# Allegro board proiect_osc_triunghiular.brd
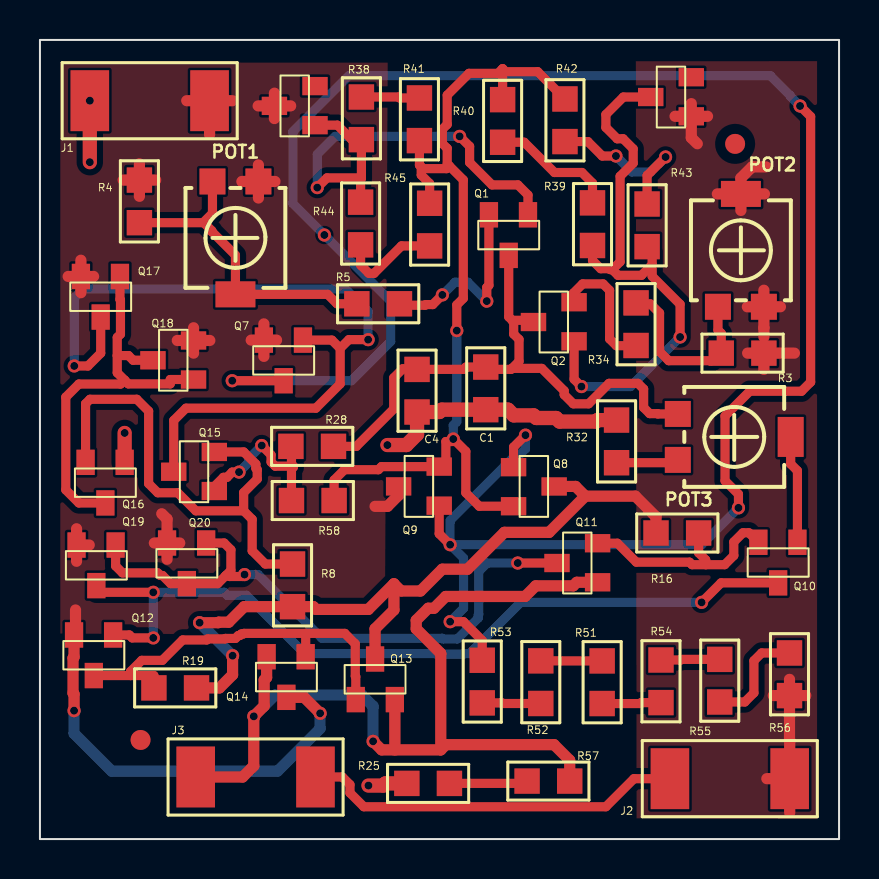
[diagram p0: board, top side]
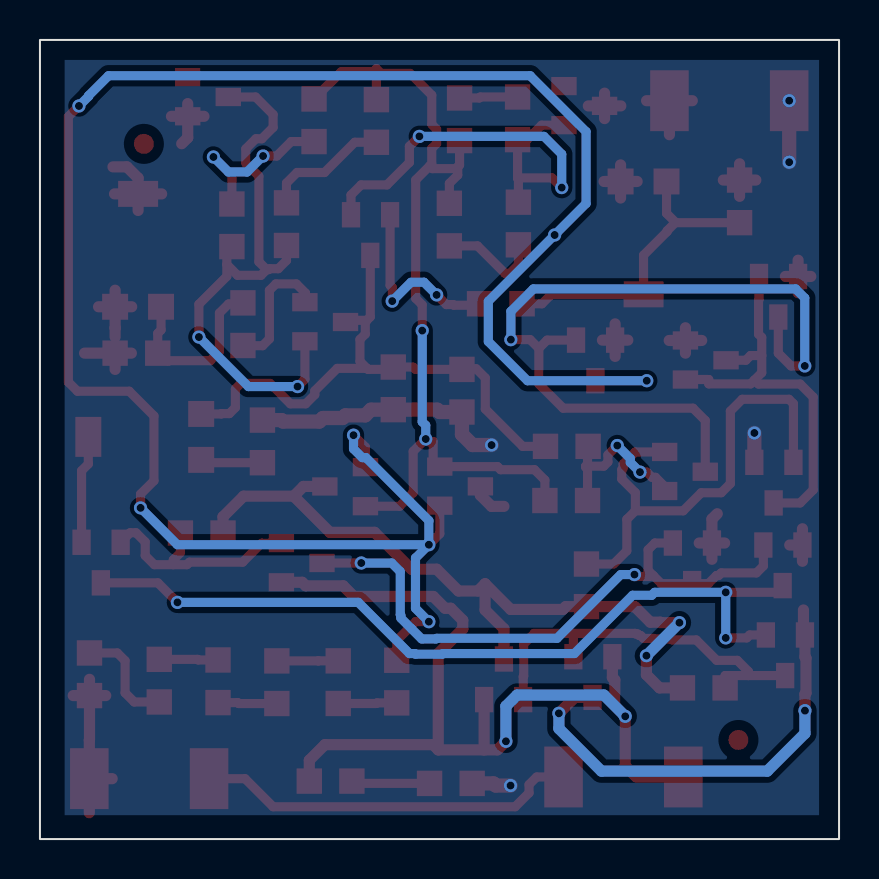
[diagram p1: board, bottom side, seen from below]

Outline 40 x 40 mm; copper layers: TOP, BOTTOM. Coordinates in mm from the lower left corner of the outline.
Outline path: rectangle 0,0 40,40

## Design rules (mm)
nets with their own width: min track width 0.457; nets N105014 N105128 N105158 N105164 N105168 N105322 N105464 N105684 N105962 N108528 N108991 N108998 N109664 N112512 N126084 N126262 N126327 N136654 N136658 N136718 N136852 N142019 N142027 N144715 N144719 N151868 N162734 N163771 N1445831 N1446051
nets with their own width: min track width 0.559; nets OUT VDD VEE
nets with their own width: min track width 0.711; nets GND

## Placement (name value [footprint] x y rotation side)
C1  100p  [SMC0805]  22.31 21.49 90 top
C4  470p  [SMC0805]  18.88 21.38 90 top
D1  BZX84-C2V7  [TO236]  32.48 36.18 0 top
D2  BZX84-C2V7  [TO236]  13.64 35.73 0 top
J1  CON2  [SMR2512]  2.5 36.96 0 top
J2  CON2  [SMR2512]  31.53 3.02 0 top
J3  CON2  [SMR2512]  7.8 3.11 0 top
NOREF  -  [unnamed]  5.04 4.96 0 top
NOREF#2  -  [unnamed]  34.8 34.8 0 top
POT1  50k  [TS53YL]  8.64 32.92 90 top
POT2  50k  [TS53YL]  36.24 26.64 270 top
POT3  500k  [TS53YL]  31.93 18.98 180 top
Q1  QBC856B  [TO236]  24.43 31.12 90 top
Q2  QBC846B  [TO236]  26.61 24.92 0 top
Q7  QBC856B  [TO236]  13.16 24.85 90 top
Q8  QBC856B  [TO236]  23.83 18.62 180 top
Q9  QBC846B  [TO236]  19.86 16.69 0 top
Q10  QBC846B  [TO236]  37.92 14.73 90 top
Q11  QBC846B  [TO236]  27.79 12.85 0 top
Q12  QBC856B  [TO236]  3.66 10.09 90 top
Q13  QBC856B  [TO236]  15.81 7.11 270 top
Q14  QBC846B  [TO236]  13.3 9 90 top
Q15  QBC846B  [TO236]  8.6 17.42 0 top
Q16  QBC846B  [TO236]  4.24 18.73 90 top
Q17  QBC856B  [TO236]  4.01 28.03 90 top
Q18  QBC856B  [TO236]  7.56 23 0 top
Q19  QBC856B  [TO236]  3.79 14.59 90 top
Q20  QBC856B  [TO236]  8.32 14.69 90 top
R3  15k  [SMR0805]  36.24 24.32 180 top
R4  15k  [SMR0805]  4.98 30.85 90 top
R5  1.5k  [SMR0805]  18 26.79 180 top
R8  47k  [SMR0805]  12.64 11.63 90 top
R16  22k  [SMR0805]  30.84 15.32 0 top
R19  10K  [SMR0805]  7.84 7.57 180 top
R25  10K  [SMR0805]  18.36 2.79 0 top
R28  150k  [SMR0805]  14.69 19.66 180 top
R32  47k  [SMR0805]  28.86 20.97 270 top
R34  1.5k  [SMR0805]  29.84 26.84 270 top
R38  2.2k  [SMR0805]  16.09 37.14 270 top
R39  2.2k  [SMR0805]  27.66 29.71 90 top
R40  2.2k  [SMR0805]  23.16 34.88 90 top
R41  2.2k  [SMR0805]  19 34.96 90 top
R42  2.2k  [SMR0805]  26.28 34.91 90 top
R43  2.2k  [SMR0805]  30.39 29.66 90 top
R44  2.2k  [SMR0805]  16.05 29.75 90 top
R45  2.2k  [SMR0805]  19.51 31.83 270 top
R51  510  [SMR0805]  28.14 8.92 270 top
R52  510  [SMR0805]  25.07 6.79 90 top
R53  510  [SMR0805]  22.14 8.95 270 top
R54  510  [SMR0805]  31.09 8.96 270 top
R55  510  [SMR0805]  34.03 6.86 90 top
R56  510  [SMR0805]  37.52 7.18 90 top
R57  10K  [SMR0805]  24.38 2.9 0 top
R58  220k  [SMR0805]  12.59 16.94 0 top

## Library data of the parts
C1 C4 = C
D1 D2 = BZX84-C2V7_1
J1-J3 = CON2
POT1-POT3 = POT
Q1 Q7 Q8 Q12 Q13 Q17-Q20 = QBC856B_0
Q2 Q9-Q11 Q14-Q16 = QBC846B_0
R3-R5 R8 R16 R19 R25 R28 R32 R34 R38-R45 R51-R58 = R

## Footprints (pads in the part's own frame, mm; a bottom-side part is the same pattern mirrored in y, then rotated)
SMC0805
  rect 1.27x1.27 smd: 1(0,0) 2(2.134,0)
SMR0805
  rect 1.27x1.27 smd: 1(0,0) 2(2.134,0)
SMR2512
  rect 1.93x3.048 smd: 1(0,0) 2(5.994,0)
TO236
  rect 1.27x0.914 smd: 1(0.127,0) 2(0.127,1.956) 3(-1.905,0.965)
TS53YL
  rect 1.3x1.3 smd: 1(0,0) 3(0,-2.3)
  rect 1.3x2 smd: 2(-5.65,-1.15)
unnamed
  round 1 smd: (0,0)

## Nets
GND: C1.1 C4.1 J1.1 Q16.1 R25.1 R32.1
VDD: D2.3 J1.2 POT1.3 Q7.2(E) Q9.3 Q12.2(E) Q14.3 Q17.2(E) Q18.2(E) Q19.2(E) Q20.2(E) R4.2
VEE: D1.1 J2.2 POT2.1 POT2.2(T) Q8.3 Q13.3 R3.1 R8.1 R16.1 R19.1 R56.1
OUT: J3.1 Q11.1 Q13.2(E) Q14.2(E) R57.2
N105014: D2.1 Q1.1 R38.2 R44.2
N105128: Q10.3 Q12.1 Q19.3
N105158: C1.2 C4.2 POT3.3 Q1.3 Q2.3 R28.1
N105164: Q7.3 Q8.1 Q9.1 R53.1
N105168: Q12.3 Q13.1 Q14.1 R19.2
N105322: Q8.2(E) Q9.2(E) R40.2 R41.1 R42.2 R45.1 R58.2
N105464: Q10.2(E) Q11.2(E) R16.2
N105684: D1.3 Q2.1 R39.1 R43.1
N105962: POT2.3 R3.2 R34.1
N108528: Q15.2(E) Q16.2(E) R8.2
N108991: Q16.3 Q17.1 Q18.1 Q18.3
N108998: Q7.1 Q15.3 Q17.3
N109664: Q11.3 Q19.1 Q20.1 Q20.3
N112512: POT1.1 POT1.2(T) R4.1 R5.2
N126084: Q15.1 R28.2 R58.1
N126262: POT3.2(T) Q10.1
N126327: POT3.1 R32.2
N136654: R38.1 R41.2
N136658: R39.2 R40.1
N136718: R42.1 R43.2
N136852: R44.1 R45.2
N142019: Q2.2(E) R34.2
N142027: Q1.2(E) R5.1
N144715: R54.1 R55.2
N144719: R55.1 R56.2
N151868: R51.2 R54.2
N162734: J2.1 J3.2
N163771: R25.2 R57.1
N1445831: R51.1 R52.2
N1446051: R52.1 R53.2

Pads without a net: D1 2; D2 2

## Via types
v1: diameter 0.66, hole 0.4, TOP to BOTTOM, 37 vias

## Routing (per net, layer and track width the routed paths; a pad name or vN(x,y) marks a point on that pad's centre or on a via; arc(x,y) is an arc through that point)
GND: length 19.6
  TOP w0.711: R32.1 27.91,20.97 27.83,20.9 26.02,20.9 25.84,21.08 24.85,21.08 24.71,21.21 23.72,21.21 23.43,21.49 C1.1 20.11,21.49 19.99,21.38 C4.1 18.88,20.26 18.34,19.72 v1(17.39,19.72) ; v1(16.44,2.68) 17.19,2.68 17.29,2.79 R25.1 ; Q16.1 v1(4.24,20.33) ; v1(2.5,36.96) v1(2.5,33.88)
VDD: length 53.6
  TOP w0.559: Q17.2 2.05,28.97 ; Q17.2 1.41,28.16 ; Q17.2 2.05,27.35 ; Q17.2 2.69,28.16 ; Q7.2 11.21,25.79 ; Q7.2 11.84,24.97 ; Q7.2 11.21,24.16 ; Q7.2 10.57,24.97 ; Q14.3 13.22,7.09 v1(14.02,6.29) ; 10.94,32.09 POT1.3 ; POT1.3 10.94,33.74 ; POT1.3 10.11,32.92 ; POT1.3 11.76,32.92 ; J1.2 8.49,37.43 ; J1.2 9.63,36.96 ; J1.2 8.49,35.26 ; J1.2 7.35,36.96 ; 6.88,24.96 Q18.2 ; Q18.2 7.69,24.32 ; Q18.2 8.5,24.96 ; Q18.2 7.69,25.59 ; R4.2 4.98,33.8 ; R4.2 4.17,32.99 ; R4.2 4.98,32.17 ; R4.2 5.79,32.99 ; 6.1,16.28 6.36,16.02 Q20.2 ; 6.36,14.01 Q20.2 ; Q20.2 7,14.82 ; Q20.2 5.73,14.82 ; 1.83,13.9 Q19.2 ; Q19.2 2.47,14.72 ; Q19.2 1.83,15.53 ; 1.78,11.47 1.78,10.22 Q12.2 1.71,9.11 1.66,9.06 1.66,7.31 1.71,7.25 v1(1.71,6.43) ; D2.3 12.55,36.7 ; D2.3 10.92,36.7 ; D2.3 11.74,37.34 ; D2.3 11.74,36.06 ; 17.78,17.65 Q9.3 17.95,17.21 17.39,16.65 16.78,16.65
  BOTTOM w0.559: v1(1.71,6.43) 1.71,5.29 3.59,3.4 11.89,3.4 14.02,5.53 v1(14.02,6.29)
VEE: length 64.2
  TOP w0.559: 27.3,17.16 29.81,17.16 30.84,16.13 R16.1 ; 27.3,17.16 25.49,15.35 23.25,15.35 21.4,13.51 20.14,13.51 19.05,12.42 18.08,12.42 17.72,12.78 ; 27.3,17.16 26.81,17.65 Q8.3 ; 17.72,12.78 17.72,11.47 16.77,10.52 Q13.3 ; 17.72,12.78 16.44,11.49 13.82,11.49 13.68,11.63 R8.1 10.23,11.63 9.45,10.86 8.95,10.86 8.92,10.83 v1(7.99,10.83) ; 32.9,34.81 32.6,35.11 D1.1 ; POT2.2 36.27,32.29 ; POT2.2 35.09,31.47 ; POT2.2 35.09,33.09 35.65,33.65 36.34,33.65 ; POT2.2 33.91,32.29 ; R19.1 8.99,7.57 9.64,8.22 v1(9.64,9.18) ; R56.1 37.52,4.96 37.53,4.95 J2.2 ; R56.1 36.71,7.18 ; R56.1 38.33,7.18 ; R56.1 37.52,7.99 ; POT2.1 37.07,26.64 ; POT2.1 36.24,27.47 ; POT2.1 36.24,25.59 36.24,25.14 ; POT2.1 35.41,26.64 ; D1.1 32.6,36.81 ; D1.1 33.42,36.18 ; D1.1 31.79,36.18 ; J2.2 37.53,1.32 ; J2.2 36.39,3.02 ; 36.24,23.51 R3.1 ; R3.1 37.77,24.32 ; R3.1 35.42,24.32
  BOTTOM w0.559: v1(7.99,10.83) v1(9.64,9.18)
OUT: length 48.1
  TOP w0.559: 20.06,4.46 17.81,4.46 17.77,4.51 ; 20.06,4.46 20.06,9.29 18.84,10.52 18.84,10.95 19.44,11.55 19.72,11.55 20.31,12.14 24.28,12.14 24.82,12.67 26.69,12.67 26.87,12.85 Q11.1 ; 20.06,4.46 20.32,4.72 25.74,4.72 26.52,3.94 R57.2 ; J3.1 10.14,3.11 10.7,3.66 v1(10.7,6.14) 11.22,6.66 11.22,7.96 11.35,8.08 Q14.2 ; 17.77,4.51 Q13.2 ; 17.77,4.51 17.72,4.46 17.1,4.46 v1(16.68,4.89)
  BOTTOM w0.559: v1(16.68,4.89) 16.68,6.65 16.12,7.21 11.77,7.21 v1(10.7,6.14)
N105014: length 23.5
  TOP w0.457: 16.09,33.09 R38.2 15.61,35.01 14.89,35.73 D2.1 ; 16.09,33.09 16.05,33.04 R44.2 ; 16.09,33.09 16.08,33.09 14.37,33.09 v1(13.88,32.61) ; Q1.1 24.43,32.24 23.92,32.74 22.63,32.74 21.51,33.87 21.51,34.67 v1(21.01,35.17)
  BOTTOM w0.457: v1(13.88,32.61) 13.88,34.28 14.77,35.17 v1(21.01,35.17)
N105128: length 41.6
  TOP w0.457: Q10.3 34.1,12.82 v1(33.12,11.85) ; Q19.3 2.82,12.35 v1(5.67,12.35) ; v1(5.67,10.07) 4.62,10.07 4.47,10.22 Q12.1
  BOTTOM w0.457: v1(5.67,10.07) v1(5.67,12.35) 9.23,12.35 9.38,12.2 10.33,12.2 13.25,9.28 19.83,9.28 19.86,9.25 21.21,9.25 21.24,9.28 21.5,9.28 24.07,11.85 v1(33.12,11.85)
N105158: length 29.5
  TOP w0.457: 23.64,25.97 23.46,26.14 Q1.3 ; 23.64,25.97 24.62,25.97 Q2.3 ; 23.64,25.97 23.71,25.89 23.71,25.28 23.98,25.01 23.98,23.91 23.63,23.56 ; R28.1 15.84,19.66 17.71,21.53 17.71,23.09 18.16,23.54 18.84,23.54 C4.2 21.21,23.51 21.32,23.63 C1.2 22.31,23.51 23.58,23.51 23.63,23.56 ; 23.63,23.56 25.12,23.56 26.24,22.44 26.24,22.24 26.7,21.79 27.46,21.79 28.49,22.81 29.93,22.81 30.22,22.53 30.22,21.6 30.52,21.3 30.91,21.3 30.92,21.28 POT3.3
N105164: length 108.7
  TOP w0.457: Q8.1 23.71,19.62 v1(24.3,20.22) ; v1(38.05,36.69) 38.58,36.16 38.58,22.87 38.12,22.42 35.53,22.42 34.29,21.18 34.29,17.94 34.96,17.26 v1(34.96,16.58) ; Q7.3 v1(9.63,22.94) ; v1(20.53,14.73) 19.98,15.28 Q9.1 ; R53.1 22.14,9.94 21.2,10.88 v1(20.53,10.88)
  BOTTOM w0.457: v1(24.3,20.22) 24.3,19.53 23.87,19.09 23.68,19.09 20.53,15.94 v1(20.53,14.73) ; v1(20.53,14.73) 21.2,14.06 21.2,11.55 v1(20.53,10.88) ; v1(20.53,14.73) 33.12,14.73 v1(34.96,16.58) ; v1(9.63,22.94) 15.59,22.94 17.56,24.91 17.56,26.92 v1(14.24,30.24) 12.66,31.81 12.66,35.41 15.46,38.21 36.57,38.21 37.56,37.21 37.56,37.18 v1(38.05,36.69)
N105168: length 20.1
  TOP w0.457: 13.3,10.29 10.21,10.29 10.18,10.27 10.08,10.27 10,10.19 9.93,10.19 9.78,10.04 9.28,10.04 9.26,10.02 8.4,10.02 8.35,9.97 7.15,9.97 6.12,8.95 5.09,8.95 4.54,8.39 4.54,8.18 ; 13.3,10.29 15.26,10.29 15.78,9.77 15.78,8.16 15.81,8.13 Q13.1 ; 13.3,10.29 Q14.1 ; 4.54,8.18 5.7,8.18 R19.2 ; 4.54,8.18 Q12.3
N105322: length 45.7
  TOP w0.457: 20.49,33.7 20.39,33.8 20.39,34.57 20.14,34.81 20.14,35.53 20.39,35.77 20.39,37.24 21.48,38.33 22.93,38.33 23.16,38.56 ; 20.49,33.7 21.19,32.99 21.19,27.06 20.87,26.74 v1(20.87,25.45) ; 20.49,33.7 20.35,33.56 19.18,33.56 19.09,33.65 ; 23.16,38.56 23.31,38.41 24.91,38.41 R42.2 ; 23.16,38.56 R40.2 ; Q8.2 21.99,16.66 21.32,17.33 21.32,19.4 20.82,19.9 20.56,19.9 ; 20.56,19.9 20.32,19.9 20.32,18.64 Q9.2 ; 20.56,19.9 v1(20.69,20.02) ; 19.98,18.6 Q9.2 ; Q9.2 17.1,18.64 16.94,18.49 15.24,18.49 14.72,17.97 R58.2 ; 19.09,33.65 19.09,33.24 19.51,32.82 R45.1 ; 19.09,33.65 19,33.74 R41.1
  BOTTOM w0.457: v1(20.69,20.02) 20.69,20.71 20.87,20.89 v1(20.87,25.45)
N105464: length 11.5
  TOP w0.457: R16.2 32.97,14.33 33.33,13.97 33.33,13.73 ; 33.33,13.73 32.64,13.73 32.52,13.86 29.85,13.86 28.9,14.81 Q11.2 ; 33.33,13.73 34.27,13.73 34.73,14.19 34.73,14.87 35.19,15.33 35.49,15.33 Q10.2
N105684: length 29.4
  TOP w0.457: D1.3 29.2,37.14 28.33,36.27 28.33,35.62 28.9,35.05 29.19,35.05 29.7,34.55 29.7,33.83 29.04,33.18 29.04,28.89 28.65,28.5 ; Q2.1 26.74,23.02 v1(27.11,22.65) ; 28.65,28.5 28.55,28.5 28.51,28.55 28.07,28.55 27.66,28.96 R39.1 ; 28.65,28.5 28.93,28.22 30.11,28.22 30.65,28.75 ; v1(32.04,25.13) 32.04,26.77 30.65,28.17 30.65,28.75 ; 30.65,28.75 30.65,29.4 R43.1
  BOTTOM w0.457: v1(32.04,25.13) 29.56,22.65 v1(27.11,22.65)
N105962: length 9.1
  TOP w0.457: POT2.3 33.94,25.48 34.1,25.31 R3.2 34.02,24.32 33.64,23.95 31.47,23.95 31.02,24.4 31.02,26.33 30.56,26.79 29.89,26.79 R34.1
N108528: length 24.8
  TOP w0.457: Q15.2 10.2,19.38 10.81,18.77 10.81,18.56 10.88,18.49 10.88,18.02 10.2,17.34 10.2,16.43 ; 10.2,16.43 10.62,16 10.62,14.43 11.28,13.77 R8.2 ; 10.2,16.43 7.8,16.43 6.9,17.33 5.9,17.33 5.44,17.79 5.44,21.42 4.85,22.01 2.51,22.01 2.28,21.79 Q16.2
N108991: length 21.2
  TOP w0.457: 4.23,22.98 4.43,22.78 6.52,22.78 6.52,23 Q18.1 ; 4.23,22.98 3.87,23.34 3.87,24.2 ; 4.23,22.98 4.03,22.78 1.95,22.78 1.29,22.12 1.29,17.48 1.95,16.82 Q16.3 ; 3.87,24.2 4.43,24.2 4.67,23.97 Q18.3 ; 3.87,24.2 3.87,25.11 4.03,25.27 4.03,26.99 4.01,27.01 Q17.1
N108998: length 40.6
  TOP w0.457: 15.03,24.56 15.46,25 v1(16.43,25) ; 15.03,24.56 15.03,22.78 13.81,21.57 7.31,21.57 6.7,20.95 Q15.3 ; 15.03,24.56 14.61,24.97 Q7.1 ; v1(1.72,23.68) 2.4,23.68 3.04,24.32 Q17.3
  BOTTOM w0.457: v1(16.43,25) 16.43,26.41 15.3,27.54 2.17,27.54 1.72,27.08 v1(1.72,23.68)
N109664: length 30.9
  TOP w0.457: Q19.1 3.79,13.67 4.13,13.32 5.9,13.32 6.03,13.19 6.13,13.19 6.54,12.79 Q20.3 8.9,12.79 9.29,13.18 ; 9.29,13.18 9.56,13.45 9.56,14.48 9.22,14.82 Q20.1 8.32,14.64 ; 9.29,13.18 9.46,13.18 9.5,13.14 10.14,13.14 v1(10.24,13.24) ; Q11.3 v1(23.92,13.82)
  BOTTOM w0.457: v1(10.24,13.24) 10.93,13.24 14.12,10.05 20.14,10.05 20.18,10.02 20.89,10.02 21.4,10.52 21.94,11.06 21.94,11.2 21.96,11.23 21.96,13.39 22.39,13.82 v1(23.92,13.82)
N112512: length 16
  TOP w0.457: R5.2 14.87,26.79 14.4,27.27 POT1.2 9.79,29.22 8.61,30.41 8.61,30.45 8.18,30.87 ; 8.18,30.87 8.64,31.32 POT1.1 ; 8.18,30.87 8.17,30.85 R4.1
N126084: length 8.7
  TOP w0.457: R58.1 12.59,18.52 12.68,18.61 12.68,18.67 ; 12.68,18.67 12.59,18.76 12.59,19.63 R28.2 12.44,19.77 ; 12.68,18.67 11.78,18.67 11.57,18.87 11.57,19.23 v1(11.1,19.7) ; Q15.1 8.73,17.65 9.19,18.11 9.36,18.11 9.62,18.37 v1(9.97,18.37)
  BOTTOM w0.457: v1(11.1,19.7) 10.45,19.05 10.45,18.85 v1(9.97,18.37)
N126262: length 5.4
  TOP w0.457: POT3.2 37.58,18.77 37.92,18.44 Q10.1
N126327: length 3.1
  TOP w0.457: POT3.1 31.79,18.84 R32.2
N136654: length 2.9
  TOP w0.457: R41.2 18,37.1 17.96,37.14 R38.1
N136658: length 6.3
  TOP w0.457: R39.2 27.66,32.84 27.13,33.36 25.76,33.36 24.24,34.88 R40.1
N136718: length 8.7
  TOP w0.457: v1(31.32,34.14) 30.39,33.22 R43.2 ; R42.1 27.42,34.91 28.15,34.19 v1(28.83,34.19)
  BOTTOM w0.457: v1(28.83,34.19) 29.63,33.39 30.57,33.39 v1(31.32,34.14)
N136852: length 5.2
  TOP w0.457: R45.2 18.1,29.69 16.72,28.32 16.47,28.32 16.05,28.73 R44.1
N142019: length 6.5
  TOP w0.457: Q2.2 26.71,26.9 26.71,27.33 27.16,27.79 28.19,27.79 28.51,27.46 28.51,25.04 28.86,24.69 29.83,24.69 R34.2
N142027: length 9.6
  TOP w0.457: Q1.2 22.47,27.72 22.37,27.61 v1(22.37,26.93) ; R5.1 18.07,26.72 19.28,26.72 19.31,26.75 19.66,26.75 v1(20.14,27.24)
  BOTTOM w0.457: v1(22.37,26.93) 21.42,27.87 20.78,27.87 v1(20.14,27.24)
N144715: length 3
  TOP w0.457: R54.1 32.08,8.96 32.11,8.99 R55.2
N144719: length 5.5
  TOP w0.457: R55.1 35.28,6.86 35.74,7.32 35.74,8.93 36.13,9.31 R56.2
N151868: length 3
  TOP w0.457: R51.2 30.05,6.78 30.1,6.83 R54.2
N162734: length 19.2
  TOP w0.457: J3.2 15.14,3.11 15.52,2.72 15.52,2.31 16.21,1.62 28.33,1.62 29.73,3.02 J2.1
N163771: length 4
  TOP w0.457: R25.2 24.38,2.79 R57.1
N1445831: length 3.1
  TOP w0.457: R52.2 26.06,8.92 26.06,8.92 R51.1
N1446051: length 2.9
  TOP w0.457: R52.1 23.16,6.79 23.13,6.82 R53.2

## Copper pours and planes (outline as drawn; the poured copper is in the pictures)
GND on BOTTOM: 1,39 38.76,39 38.76,1.19 1,1.19
VDD on TOP: 1.02,38.87 1.02,10.29 17.26,10.23 17.41,38.87
VEE on TOP: 29.83,38.94 38.9,38.94 38.9,1 29.86,1.04

## Text on the board
XSECTION_CHART: *  SURFACE - 0 MIL | L1 TOP CONDUCTOR - 0.709 MIL | *  DIELECTRIC - 57.637 MIL | L2 BOTTOM CONDUCTOR - 0.709 MIL | TOTAL THICKNESS 59.054 MIL | DESIGN CROSS SECTION CHART | ___________________________ | 1-2
DEVICE_TYPE_TOP: 431C | Duta | Robert
User.6: FIGURE | FINISHED_SIZE | 15.75 | DRILL CHART: TOP to BOTTOM | ALL UNITS ARE IN MILS | PLATED | QTY | 40
